# EAGLE board brakelight_V2 (EAGLE 9.5.2)
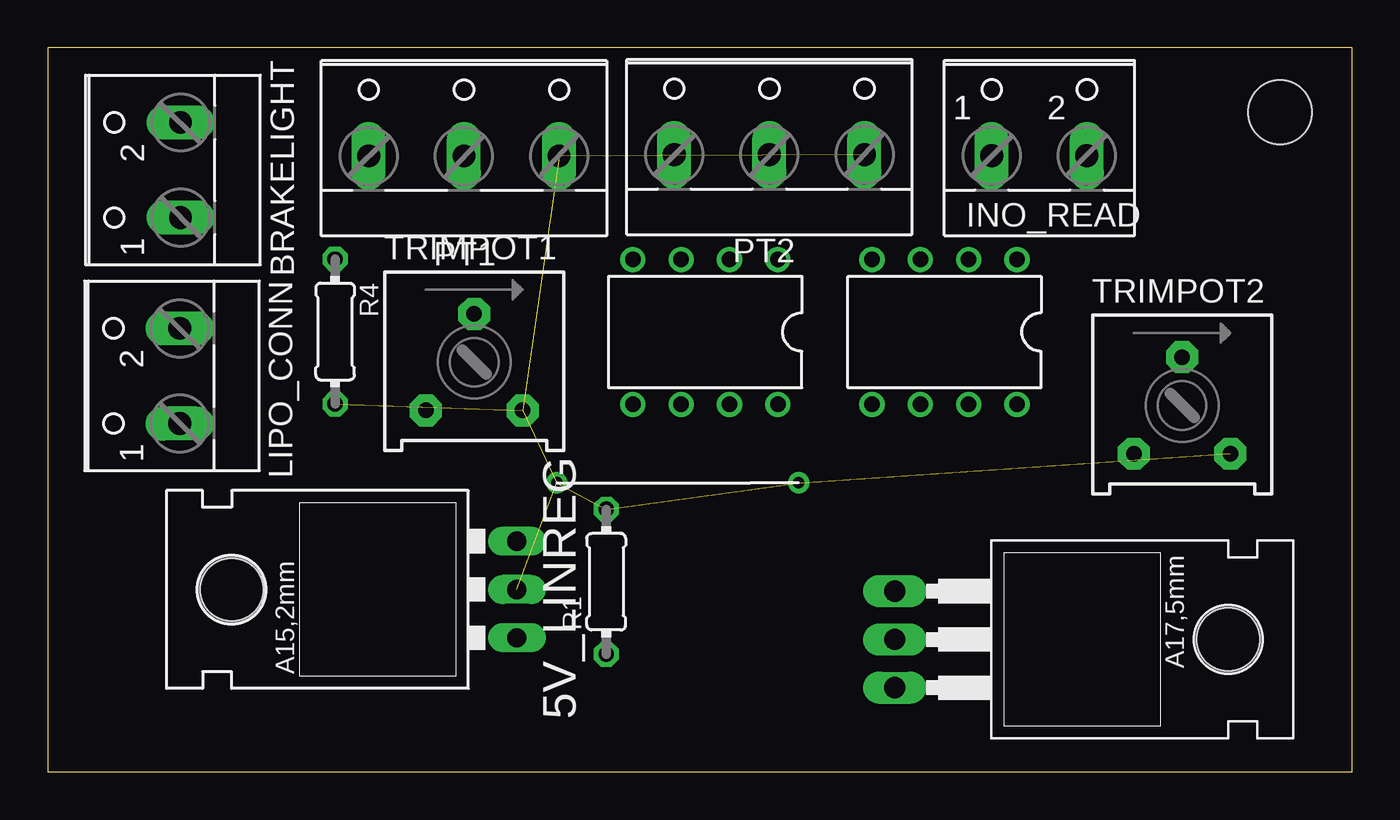
[diagram p0: board, top side]
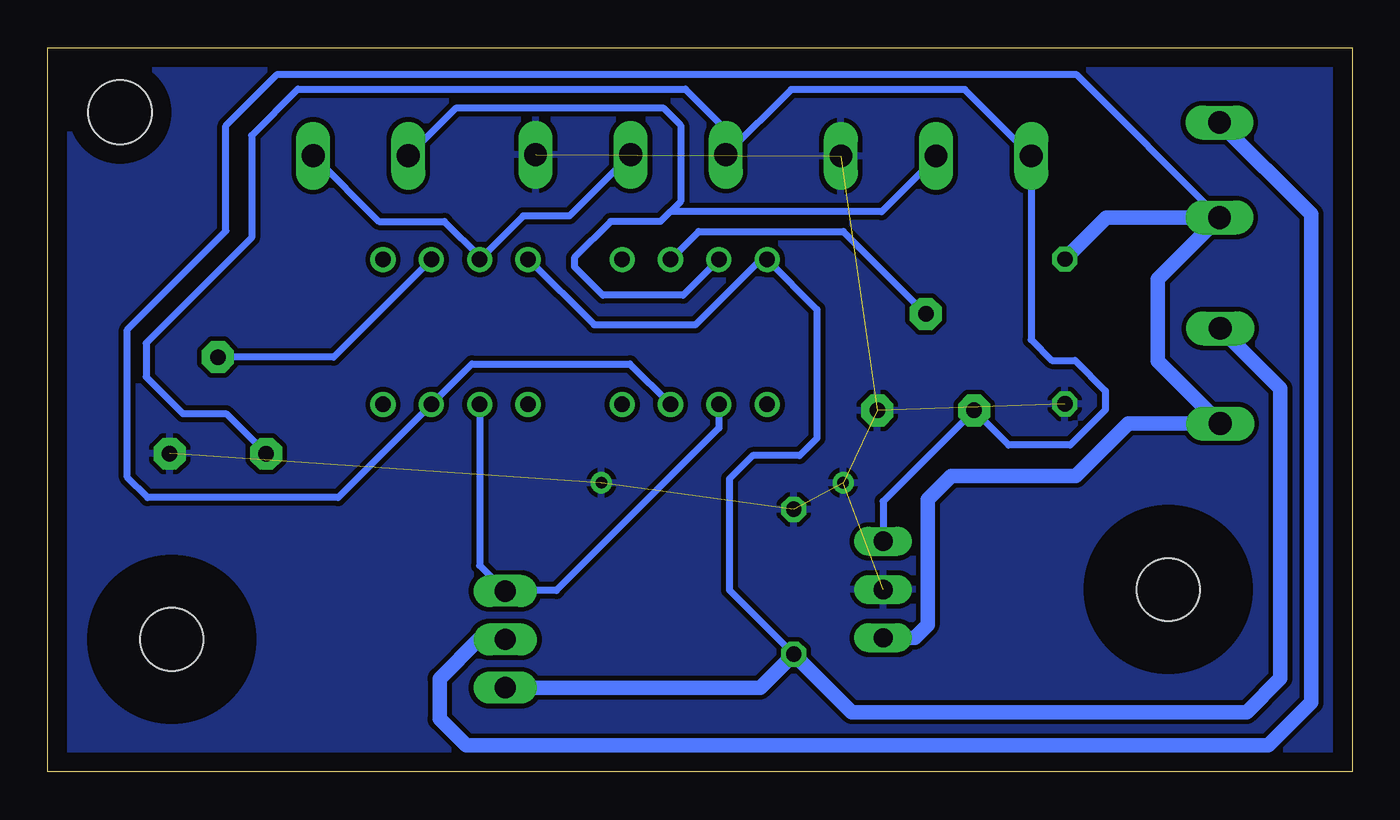
[diagram p1: board, bottom side, seen from below]

Size 68.58 x 38.1 mm. Coordinates in mm from the lower left corner, seen from the top.
Outline: 0,0 68.58,0 68.58,38.1 0,38.1 0,0
Copper layers (1*16): Top 0.035mm / dielectric 1.5mm / Bottom 0.035mm
Design rules "default": minimum track width 6mil, minimum drill 0.35mm, track to track 6mil, track to pad 6mil, pad to pad 6mil, via to via 6mil, smd to smd 6mil, copper to edge 40mil, drill to drill 6mil, minimum pad ring 10mil, minimum via ring 8mil, stop-mask expansion 4mil, vias tented up to drill 0mil, thermal gap 10mil
Holes 3.35 mm at 64.77,34.7

## Footprints (pad centres in the part's own frame; a part is rotated, then mirrored left to right if it is on the bottom)
78XXL = drill 1.016 long: GND 0,-3.81; IN -2.54,-3.81; OUT 2.54,-3.81 | hole 3.302: 0,11.176
W237-102 = drill 1.194 long: 1 -2.5,-1.27; 2 2.5,-1.27
W237-103 = drill 1.194 long: 1 -5,-1.29; 2 0,-1.29; 3 5,-1.29
TO220 = drill 1.118 long: 1 -2.54,-6.35; 2 0,-6.35; 3 2.54,-6.35 | hole 3.302: 0,11.176
0204/7 = drill 0.813 octagon: 1 -3.81,0; 2 3.81,0
3386Y = drill 0.813 pad 1.676 octagon: 1 -2.54,-2.54; 2 0,2.54; 3 2.54,-2.54
DIL08 = drill 0.813 pad 1.27: 1 -3.81,-3.81; 2 -1.27,-3.81; 3 1.27,-3.81; 4 3.81,-3.81; 5 3.81,3.81; 6 1.27,3.81; 7 -1.27,3.81; 8 -3.81,3.81
0_OHM_RESISTOR = drill 0.6: P$1 -6.35,0; P$2 6.35,0

## Placement (x,y rotation side)
5V_LINREG  [78XXL]  20.85,9.6 90 top
BRAKELIGHT  [W237-102]  5.72,31.66 90 top
INO_READ  [W237-102]  52.12,33.68 0 top
LIPO_CONN  [W237-102]  5.68,20.83 90 top
PT1  [W237-103]  21.88,33.69 0 top
PT2  [W237-103]  37.93,33.75 0 top
Q2  30N06L  [TO220]  50.88,6.98 270 top
R1  2.2k  [0204/7]  29.36,10.01 90 top
R4  2.2k  [0204/7]  15.11,23.16 270 top
TRIMPOT1  [3386Y]  22.42,21.55 0 top
TRIMPOT2  [3386Y]  59.63,19.28 0 top
U$1  LM741CN  [DIL08]  34.57,23.14 180 top
U$2  LM741CN  [DIL08]  47.14,23.14 180 top
U$4  0_OHM_RESISTOR  [0_OHM_RESISTOR]  33.12,15.21 0 top

## Library data of the parts
5V_LINREG = v-reg
BRAKELIGHT INO_READ LIPO_CONN = con-wago-500; MPN: 237-102; OC_FARNELL: unknown; OC_NEWARK: 70K9898
PT1 PT2 = con-wago-500; MPN: 237-103; OC_FARNELL: unknown; OC_NEWARK: 18M7116
Q2 = transistor-fet; SPICEPREFIX: Q
R1 R4 = rcl; SPICEPREFIX: R
TRIMPOT1 TRIMPOT2 = bourns
U$1 U$2 U$4 = GTOR

## Nets
0V: 5V_LINREG.GND PT1.3 PT2.3 R1.2 R4.2 TRIMPOT1.3 TRIMPOT2.3 U$4.P$1 U$4.P$2
5V: 5V_LINREG.OUT PT1.1 PT2.1 TRIMPOT1.1 TRIMPOT2.1
N$1: Q2.1 U$1.6 U$2.6
N$2: BRAKELIGHT.2 Q2.2
PT1: INO_READ.1 PT1.2 U$1.3
PT2: INO_READ.2 PT2.2 U$2.3
THRESH1: TRIMPOT1.2 U$1.2
THRESH2: TRIMPOT2.2 U$2.2
V+: 5V_LINREG.IN BRAKELIGHT.1 LIPO_CONN.1 R4.1 U$1.7 U$2.7
V-: LIPO_CONN.2 Q2.3 R1.1 U$1.4 U$2.4

## Tracks (layer width: path | path; a pad name or v marks a point on that pad's centre or on a via)
0V  (8 unrouted)
  pour Bottom (isolate 0.254): 0,38.07 68.61,38.07 68.61,-0.05 0.05,-0.05 0,0
5V
  Bottom 0.381: 5V_LINREG.OUT 24.66,14.24 TRIMPOT1.1 18.07,17.2 14.83,17.2 12.98,19.05 12.98,20.04 14.58,21.64 15.8,21.64 16.89,22.73 16.89,32.39 PT1.1 20.37,35.89 29.51,35.89 PT2.1 32.93,33.79 35.06,35.92 55.42,35.92 57.86,33.48 57.86,28.09 63.4,22.55 63.4,20.78 61.47,18.85 59.2,18.85 TRIMPOT2.1
N$1
  Bottom 0.381: U$2.6 45.87,10.86 44.56,9.55 | 44.56,9.55 Q2.1 | U$1.6 33.3,18.09 41.84,9.55 44.56,9.55
N$2
  Bottom 0.762: BRAKELIGHT.2 2.16,29.33 2.16,3.66 4.42,1.4 46.58,1.4 47.98,2.79 47.98,4.9 45.91,6.98 Q2.2
PT1
  Bottom 0.381: INO_READ.1 47.13,34.9 36.2,34.9 35.31,34.01 35.31,30 35.84,29.46 | U$1.3 35.18,25.07 39.4,25.07 40.89,26.57 40.89,27.05 38.99,28.96 36.37,28.96 35.87,29.46 35.84,29.46 | PT1.2 21.88,32.32 24.74,29.46 35.84,29.46
PT2
  Bottom 0.381: INO_READ.2 51.17,28.96 47.73,28.96 45.87,27.1 U$2.3 43.59,29.23 41.16,29.23 PT2.2
THRESH1
  Bottom 0.381: U$1.2 34.37,28.42 26.75,28.42 TRIMPOT1.2
THRESH2
  Bottom 0.381: U$2.2 53.54,21.82 TRIMPOT2.2
V+
  Bottom 0.381: U$1.7 37.97,21.46 46.28,21.46 U$2.7 53.31,14.43 63.32,14.43 64.39,15.49 64.39,23.27 59.21,28.45 59.21,33.98 56.5,36.69 14.52,36.69 BRAKELIGHT.1
  Bottom 0.762: 5V_LINREG.IN 23.02,7.06 22.33,7.75 22.33,14.33 21.08,15.57 14.53,15.57 11.77,18.33 LIPO_CONN.1 10.24,21.62 10.24,25.91 BRAKELIGHT.1 12.93,29.16 R4.1
V-
  Bottom 0.381: U$2.4 43.28,26.95 39.85,23.52 34.52,23.52 31.09,26.95 U$1.4 28.14,24.33 28.14,17.55 29.06,16.64 31.52,16.64 32.74,15.42 32.74,9.58 R1.1
  Bottom 0.762: LIPO_CONN.2 3.79,20.17 3.79,4.93 5.56,3.15 26.31,3.15 R1.1 31.12,4.44 Q2.3